# Altium PCB PCB_3U_Tester.PCBDOC (part 2 of 2)
Units mm, origin at the board's own origin, x right, y up, seen from the top; angles counter-clockwise.
Board outline 63.4 x 100 mm, 4 copper layers (Top, MP(GND), L3, Bot), stack 0.905 mm thick; 74 components, 58 nets, 355 pads, 142 vias.
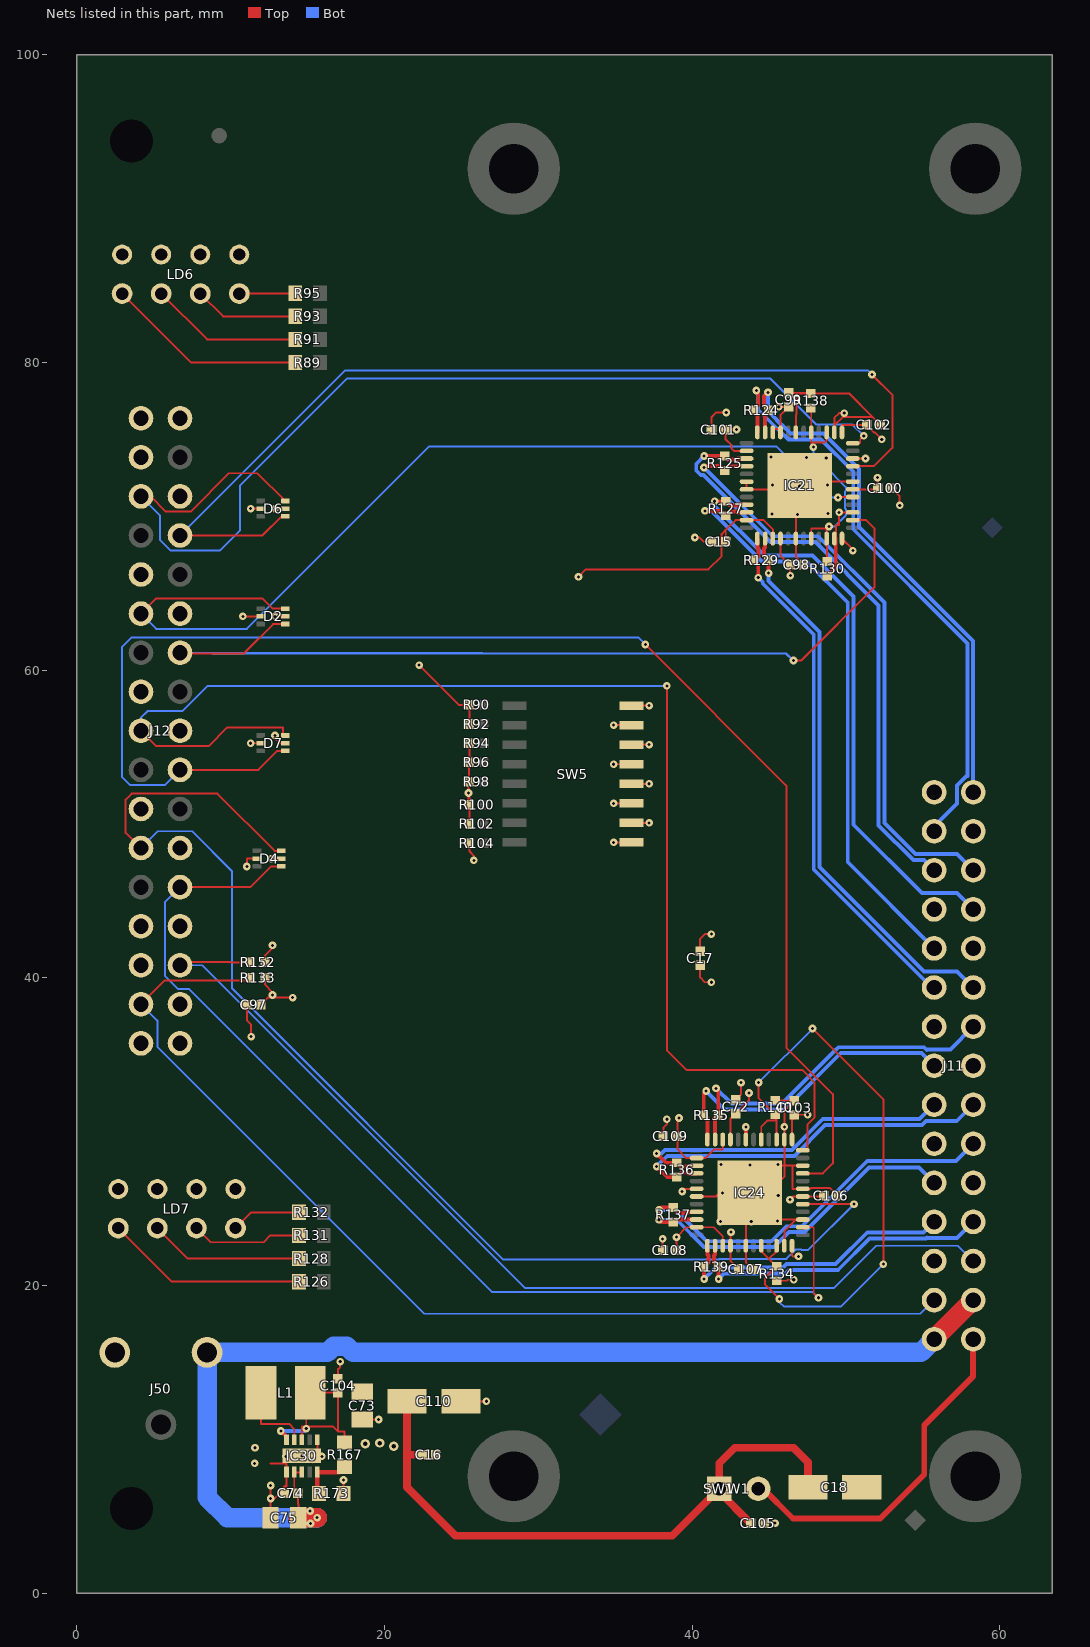
[diagram p4: the nets of this part, all layers, seen from the top]

## Via types
v1: diameter 0.5, hole 0.2, Top to Bot, tented both sides, 139 vias
v2: diameter 0.6, hole 0.3, Top to Bot, tented both sides, 3 vias

## Nets (pads, with @x,y where several pads share a name; then routed paths per layer and width w, separated by ;. In a path a pad name is that pad's centre, name@x,y a point inside that pad or via, vN(x,y) a via of type N, cw(c..) or ccw(c..) an arc to the next point about the centre after c; other vN are vias at no path point) (continued)
GND: C15.1 C16.1 C17.1 C18.2 C72.1 C73.1 C74.1 C75.1 C97.1 C98.1 C99.1 C100.1 C101.1 C102.1 C103.1 C104.1 C105.1 C106.1 C107.1 C108.1 C109.1 C110.2 D2.2 D4.2 D6.2 D7.2 IC21.6 IC21.7 IC21.18 IC21.23 IC21.27 IC21.31 IC21.34 IC21.38 IC21.43 IC21.49 IC24.6 IC24.7 IC24.18 IC24.23 IC24.27 IC24.31 IC24.34 IC24.38 IC24.43 IC24.49 IC30.1 IC30.6 IC30.11 J11.1 J11.4 J11.7 J11.10 J11.13 J11.16 J11.19 J11.22 J11.25 J12.1 J12.2 J12.3 J12.8 J12.11 J12.14 J12.17 J12.20 J12.23 J12.26 J12.29 J12.32 J12.33 J12.34 J50.2 R130.2 R134.2 R138.2 R140.2 R173.1 SW5.9 SW5.10 SW5.11 SW5.12 SW5.13 SW5.14 SW5.15 SW5.16 | length 112.3
  Top w0.127: v1(10.79,63.5) D2.2@11.96,63.5 ; v1(11.048,47.242) 11.048,47.75 D4.2@11.71,47.75 ; C97.1@11.05,38.25 11.05,37.231 11.328,36.952 v1(11.328,36.172) ; v1(11.298,55.25) D7.2@11.96,55.25 ; v1(11.298,70.5) D6.2@11.96,70.5 ; C75.1@12.593,4.902 v1(12.593,6.995) ; v1(12.598,6.147) 12.843,6.147 C74.1@13.469,6.773 ; 12.598,8.433 13.564,8.433 13.63,8.366 IC30.1@13.63,7.865 13.63,7.087 ; C74.1@13.469,6.502 C74.1@13.469,6.773 ; v1(14.63,8.915) IC30.11@15.63,8.915 ; IC30.11@15.316,8.484 15.63,8.798 IC30.11@15.63,8.915 ; IC30.6@15.63,9.965 IC30.11@15.63,8.915 ; C104.1@16.967,13.937 16.967,14.537 17.12,14.69 v1(17.12,15.05) ; R173.1@17.335,6.477 v1(17.335,7.354) ; C73.1@18.542,11.292 v1(19.619,11.292) ; C110.2@24.966,12.471 v1(26.618,12.471) ; v1(34.898,48.805) SW5.9@36.05,48.805 ; v1(34.898,51.345) SW5.11@36.05,51.345 ; v1(34.898,53.885) SW5.13@36.05,53.885 ; v1(34.898,56.425) SW5.15@36.05,56.425 ; SW5.10@36.05,50.075 v1(37.202,50.075) ; SW5.12@36.05,52.615 v1(37.202,52.615) ; SW5.14@36.05,55.155 v1(37.202,55.155) ; SW5.16@36.05,57.695 v1(37.202,57.695) ; C108.1@38.082,22.301 v1(38.082,23.031) ; C109.1@38.133,29.693 38.133,30.258 38.354,30.479 v1(38.354,30.805) ; v1(39.345,26.111) 39.518,26.285 IC24.6@40.289,26.285 IC24.6@40.31,26.285 ; v1(40.17,68.631) 40.466,68.631 40.746,68.351 C15.1@41.282,68.351 ; IC24.7@40.289,25.785 41.536,25.785 ; C17.1@40.513,41.725 40.513,42.526 40.824,42.838 v1(41.25,42.838) ; C101.1@41.257,75.641 41.257,76.442 41.568,76.754 v1(42.215,76.754) ; C72.1@42.824,32.073 43.18,32.429 v1(43.18,33.186) ; IC21.6@43.54,72.259 43.536,72.259 43.536,71.759 IC21.7@43.54,71.759 45.415,71.759 45.415,72.009 IC21.49@46.99,72.009 ; IC24.49@43.739,26.035 IC24.49@43.739,27.785 ; C107.1@43.935,21.057 43.489,21.503 IC24.18@43.489,22.585 43.489,24.236 43.538,24.285 46.736,24.285 ; C105.1@44.697,4.547 v1(45.39,4.547) ; R140.2@45.415,32.042 46.012,32.042 46.057,31.997 C103.1@46.634,31.997 45.989,31.351 v1(45.989,30.312) IC24.38@45.989,29.485 45.989,27.785 ; R134.2@45.491,20.307 46.136,20.307 46.199,20.371 v1(46.604,20.371) ; IC24.23@45.989,22.585 45.989,23.538 46.736,24.285 ; C99.1@46.279,78.022 47.447,78.022 R138.2@47.447,77.991 ; IC21.43@46.74,75.459 46.74,76.585 46.787,76.632 46.787,77.724 47.054,77.991 R138.2@47.447,77.991 ; IC24.27@47.189,24.285 46.736,24.285 ; IC24.34@47.189,27.785 46.533,27.785 ; C98.1@47.262,66.853 46.74,67.375 IC21.18@46.74,68.559 46.74,70.434 46.99,70.434 v1(46.99,71.958) IC21.49@46.99,72.009 ; IC21.23@49.24,68.559 IC21.23@49.335,68.655 ; IC21.38@49.24,75.459 49.24,75.91 ; C106.1@49.447,25.832 48.939,26.34 47.731,26.34 47.676,26.285 IC24.31@47.189,26.285 46.533,26.285 46.533,27.785 ; v1@49.555,70.282 v1(49.555,70.259) ; v1(49.886,76.712) 49.551,76.712 49.24,76.4 49.24,75.91 ; IC21.27@50.44,70.259 v1(49.555,70.259) ; IC21.31@50.44,72.259 47.24,72.259 IC21.49@46.99,72.009 ; IC21.34@50.44,73.759 v1(51.267,73.759) ; C102.1@52.241,75.946 51.733,76.454 ; C100.1@52.977,71.831 53.492,71.316 v1(53.492,70.719) ; C74.1@13.469,6.773 13.63,6.934 13.63,7.01 ; C74.1@13.469,6.773 13.469,6.849 ; 13.469,6.849 13.63,7.01 ; 13.469,6.849 13.469,6.925 13.63,7.087 ; 13.63,7.01 13.63,7.087 ; 41.536,25.785 43.536,27.785 IC24.49@43.739,27.785 ; 41.536,25.785 41.736,25.785 v1(41.961,26.01) 44.479,26.01 44.704,25.785 45.989,27.07 45.989,27.785 ; IC24.49@43.739,27.785 45.568,27.785 45.989,27.785 ; 45.989,27.785 46.533,27.785 ; R138.2@47.447,77.991 R138.2@47.701,77.991 50.196,77.991 51.733,76.454 ; 49.24,75.91 49.784,76.454 51.733,76.454 ; IC21.23@49.335,68.655 49.335,69.342 49.352,69.359 ; IC21.23@49.335,68.655 49.352,68.671 49.352,69.359 ; 49.352,69.359 49.352,69.444 49.437,69.444 ; 49.352,69.359 49.437,69.444 ; 49.437,69.444 49.555,69.444 49.555,69.562 ; 49.437,69.444 49.555,69.562 ; 49.555,69.562 v1(49.555,70.259)
  Top w0.254: IC24.43@43.489,29.485 v1(43.489,30.306) ; R130.2@48.768,66.129 48.787,66.129 49.332,66.674 49.332,68.559 IC21.23@49.24,68.559
  other v1: 11.557,8.433 13.589,8.89 15.926,8.89 11.582,9.449 41.834,24.155 43.84,24.155 45.542,24.181 45.593,25.857 43.79,25.908 43.764,27.838 41.885,27.864 45.568,27.864 46.838,70.129 45.187,70.155 48.819,70.18 45.212,72.034 48.793,72.034 48.717,73.787 47.422,73.838 45.136,73.863
I2C_SCL: J11.27 J12.4 R133.2 | length 69.2
  Top w0.127: J12.4@4.165,38.278 5.715,39.827 11.28,39.827 R133.2@11.28,40
  Bot w0.127: J12.4@4.165,38.278 5.232,37.211 5.232,35.509 22.581,18.161 54.839,18.161 J11.27@55.728,19.05
I2C_SDA: J11.26 J12.5 R152.2 | length 66.6
  Top w0.127: J12.5@6.705,40.818 6.705,41.021 9.987,41.021 10.008,41 R152.2@11.28,41
  Bot w0.127: J12.5@6.705,40.818 8.153,40.818 29.15,19.821 49.209,19.821 51.968,22.581 57.277,22.581 J11.26@58.268,21.59
LVDS1_N: IC21.48 J11.3 R124.2 | length 39.6
  Top w0.254: v1(44.175,78.181) 44.298,78.058 44.298,77.203 R124.2@44.005,76.911 44.299,76.617 44.24,76.558 IC21.48@44.24,75.459
  Bot w0.254: v1(44.175,78.181) 44.298,78.058 44.298,76.931 45.661,75.568 46.252,75.002 48.386,75.002 50.474,72.914 50.474,69.16 57.887,61.747 57.887,53.124 57.831,53.124 57.214,52.507 57.214,51.325 55.728,49.839 J11.3@55.728,49.53
LVDS1_P: IC21.47 J11.2 R124.1 | length 35.7
  Top w0.254: IC21.47@44.74,75.459 44.74,76.587 44.68,76.646 R124.1@44.945,76.911 44.679,77.178 44.679,77.812 v1(44.925,78.058)
  Bot w0.254: v1(44.925,78.058) 44.925,76.868 45.524,76.269 45.524,76.244 45.819,75.949 45.844,75.949 46.41,75.383 48.544,75.383 50.855,73.073 50.855,69.318 58.268,61.905 J11.2@58.268,52.07
LVDS2_N: IC21.4 J11.6 R125.2 | length 39.8
  Top w0.254: v1(40.767,73.179) 40.867,73.279 41.821,73.279 R125.2@42.113,72.987 42.385,73.259 IC21.4@43.54,73.259
  Bot w0.254: v1(40.767,73.179) 45.239,68.707 48.184,68.707 52.502,64.389 52.502,50.063 54.521,48.044 57.214,48.044 J11.6@58.268,46.99
LVDS2_P: IC21.3 J11.5 R125.1 | length 38.7
  Top w0.254: v1(40.78,73.927) R125.1@42.113,73.927 42.34,73.7 42.903,73.7 42.963,73.759 IC21.3@43.54,73.759
  Bot w0.254: v1(40.78,73.927) 40.263,73.41 40.274,73.399 40.263,73.388 40.263,72.971 40.558,72.675 40.732,72.675 45.082,68.326 48.006,68.326 52.121,64.211 52.121,49.906 54.376,47.65 55.067,47.65 J11.5@55.728,46.99
LVDS3_N: IC21.10 J11.9 R127.2 | length 39.5
  Top w0.254: v1(40.839,70.358) 41.872,70.358 R127.2@42.189,70.04 42.467,70.318 42.903,70.318 42.963,70.259 IC21.10@43.54,70.259
  Bot w0.254: v1(40.839,70.358) 41.244,70.358 44.533,67.069 47.434,67.069 50.114,64.389 50.114,47.524 J11.9@55.728,41.91
LVDS3_P: IC21.9 J11.8 R127.1 | length 38.9
  Top w0.254: v1(41.458,70.98) R127.1@42.189,70.98 42.47,70.699 42.903,70.699 42.963,70.759 IC21.9@43.54,70.759
  Bot w0.254: v1(41.458,70.98) 41.458,70.683 44.691,67.45 47.822,67.45 50.495,64.777 50.495,49.952 54.943,45.504 57.214,45.504 J11.8@58.268,44.45
LVDS4_N: IC21.14 J11.12 R129.2 | length 36.1
  Top w0.254: IC21.14@44.74,68.559 44.74,67.982 44.68,67.922 44.68,67.423 R129.2@44.971,67.132 v1(44.971,66.311)
  Bot w0.254: v1(44.971,66.311) 44.971,65.799 48.285,62.484 48.285,47.199 55.06,40.424 57.214,40.424 J11.12@58.268,39.37
LVDS4_P: IC21.13 J11.11 R129.1 | length 34.3
  Top w0.254: IC21.13@44.24,68.559 44.24,67.982 44.299,67.922 44.299,67.401 R129.1@44.031,67.132 44.298,66.865 v1(44.298,66.019)
  Bot w0.254: v1(44.298,66.019) 44.59,65.726 44.59,65.641 47.904,62.326 47.904,47.041 55.575,39.37 J11.11@55.728,39.37
LVDS5_N: IC24.48 J11.15 R135.2 | length 20.5
  Top w0.254: v1(40.907,32.639) 40.754,32.486 R135.2@40.754,31.064 40.78,31.064 41.048,30.796 40.989,30.736 IC24.48@40.989,29.485
  Bot w0.254: v1(40.907,32.639) 42.1,31.445 45.999,31.445 49.657,35.103 54.915,35.103 J11.15@55.728,34.29
LVDS5_P: IC24.47 J11.14 R135.1 | length 22.9
  Top w0.254: IC24.47@41.489,29.485 41.489,30.765 41.429,30.825 41.669,31.064 R135.1@41.694,31.064 41.694,32.677 v1(41.554,32.817)
  Bot w0.254: v1(41.554,32.817) 42.545,31.826 45.842,31.826 49.359,35.344 49.499,35.484 55.073,35.484 55.252,35.305 55.291,35.344 56.164,35.344 56.782,35.344 J11.14@58.268,36.83
LVDS6_N: IC24.4 J11.18 R136.2 | length 25.3
  Top w0.254: v1(37.694,27.737) 38.392,27.038 R136.2@38.989,27.038 39.295,27.345 39.652,27.345 39.712,27.285 IC24.4@40.289,27.285
  Bot w0.254: v1(37.694,27.737) 38.379,28.423 46.64,28.423 48.646,30.429 54.946,30.429 55.2,30.683 57.201,30.683 J11.18@58.268,31.75
LVDS6_P: IC24.3 J11.17 R136.1 | length 22.3
  Top w0.254: v1(37.694,28.575) 38.29,27.978 R136.1@38.989,27.978 39.242,27.726 39.652,27.726 39.712,27.785 IC24.3@40.289,27.785
  Bot w0.254: v1(37.694,28.575) 37.993,28.575 38.222,28.804 46.482,28.804 48.489,30.81 54.788,30.81 J11.17@55.728,31.75
LVDS7_N: IC24.10 J11.21 R137.2 | length 23.7
  Top w0.254: v1(37.846,24.274) 38.003,24.117 R137.2@38.76,24.117 38.928,24.285 IC24.10@40.289,24.285
  Bot w0.254: v1(37.846,24.274) 38.998,24.274 40.78,22.492 45.326,22.492 46.301,23.467 47.298,23.467 51.491,27.661 54.737,27.661 J11.21@55.728,26.67
LVDS7_P: IC24.9 J11.20 R137.1 | length 26.6
  Top w0.254: v1(37.846,24.901) 38.003,25.057 R137.1@38.76,25.057 39.033,24.785 39.221,24.785 39.288,24.718 39.706,24.718 39.773,24.785 IC24.9@40.289,24.785
  Bot w0.254: v1(37.846,24.901) 38.909,24.901 40.665,23.145 40.938,22.873 45.168,22.873 46.144,23.848 47.14,23.848 51.384,28.092 57.15,28.092 J11.20@58.268,29.21
LVDS8_N: IC24.14 J11.24 R139.2 | length 20.4
  Top w0.254: IC24.14@41.489,22.585 41.489,22.008 41.429,21.948 41.429,21.499 R139.2@41.72,21.209 v1(41.72,20.422)
  Bot w0.254: v1(41.72,20.422) 42.075,20.777 46.056,20.777 46.288,21.01 49.483,21.01 49.53,21.057 51.537,23.063 55.2,23.063 55.252,23.115 55.291,23.076 56.164,23.076 57.214,23.076 J11.24@58.268,24.13
LVDS8_P: IC24.13 J11.23 R139.1 | length 18.8
  Top w0.254: v1(40.78,20.422) R139.1@40.78,21.209 41.048,21.478 41.048,21.948 40.989,22.008 IC24.13@40.989,22.585
  Bot w0.254: v1(40.78,20.422) 41.465,21.107 41.867,21.107 41.917,21.158 45.898,21.158 46.13,21.391 49.325,21.391 51.379,23.444 55.042,23.444 J11.23@55.728,24.13
NetIC21_20: IC21.20 IC21.22 IC21.39 IC21.41 R130.1 R138.1 | length 15
  Top w0.127: R138.1@47.701,77.051 47.74,77.012 IC21.41@47.74,75.459 47.74,74.79 ; IC21.20@47.74,68.559 47.74,69.215 v1@48.768,69.215 ; v1(47.879,74.498) 47.74,74.637 47.74,74.79 ; IC21.39@48.74,75.459 48.74,74.93 48.6,74.79 47.74,74.79 ; R130.1@48.768,67.069 48.768,68.047 48.74,68.075 IC21.22@48.74,68.559 48.74,69.187 v1@48.768,69.215 ; v1(48.895,69.342) v1@48.768,69.215
  Bot w0.127: v1(47.879,74.498) 47.879,74.002 48.535,73.347 48.548,73.347 49.996,71.899 49.996,71.679 49.922,71.605 49.922,70.538 49.996,70.464 49.996,70.077 49.974,70.055 ; v1(48.895,69.342) 49.261,69.342 49.974,70.055
NetIC24_20: IC24.20 IC24.22 IC24.39 IC24.41 R134.1 R140.1 | length 42.5
  Top w0.127: v1(44.323,33.198) 44.323,32.182 45.403,31.102 R140.1@45.415,31.102 ; IC24.20@44.489,22.585 44.489,22.237 44.989,21.737 ; IC24.41@44.489,29.485 44.489,30.304 44.919,30.734 45.415,30.734 R140.1@45.415,31.102 ; IC24.22@45.489,22.585 45.489,22.237 44.989,21.737 ; IC24.39@45.489,29.485 45.489,30.734 R140.1@45.415,31.102 ; R134.1@45.491,21.247 R134.1@45.485,21.241 ; v1(45.669,19.126) 44.729,20.066 44.729,20.485 R134.1@45.485,21.241 ; v1(47.828,36.703) 52.426,32.106 v1(52.426,21.387) ; 44.989,21.737 R134.1@45.485,21.241
  Bot w0.127: v1(44.323,33.198) v1(47.828,36.703) ; v1(45.669,19.126) 45.669,18.923 45.974,18.618 49.657,18.618 v1(52.426,21.387)
NetIC30_5: IC30.5 R167.1 R173.2 | length 3.3
  Top w0.305: R173.2@15.735,6.477 15.63,6.582 IC30.5@15.63,7.865 17.073,7.865 R167.1@17.399,8.192
NetIC30_9: IC30.9 L1.1 | length 5
  Top w0.127: L1.1@11.964,13.03 11.964,10.998 13.8,10.998 14.13,10.668 IC30.9@14.13,9.965
NetLD6_1: LD6.1 R89.1 | length 13.1
  Top w0.127: LD6.1@2.94,84.48 7.42,80 R89.1@14.2,80
NetLD6_3: LD6.3 R91.1 | length 10
  Top w0.127: LD6.3@5.48,84.48 8.46,81.5 R91.1@14.2,81.5
NetLD6_5: LD6.5 R93.1 | length 6.8
  Top w0.127: LD6.5@8.02,84.48 9.5,83 R93.1@14.2,83
NetLD6_7: LD6.7 R95.1 | length 3.6
  Top w0.127: LD6.7@10.56,84.48 12.37,84.48 12.39,84.5 R95.1@14.2,84.5
NetLD7_1: LD7.1 R126.1 | length 13.2
  Top w0.127: LD7.1@2.69,23.73 6.17,20.25 R126.1@14.45,20.25
NetLD7_3: LD7.3 R128.1 | length 10
  Top w0.127: LD7.3@5.23,23.73 7.21,21.75 R128.1@14.45,21.75
NetLD7_5: LD7.5 R131.1 | length 7.2
  Top w0.127: LD7.5@7.77,23.73 8.691,22.809 12.141,22.809 12.582,23.25 R131.1@14.45,23.25
NetLD7_7: LD7.7 R132.1 | length 4.6
  Top w0.127: LD7.7@10.31,23.73 11.33,24.75 R132.1@14.45,24.75
P3V3: C15.2 C16.2 C17.2 C18.1 C72.2 C73.2 C97.2 C98.2 C99.2 C100.2 C101.2 C102.2 C103.2 C104.2 C105.2 C106.2 C107.2 C108.2 C109.2 C110.1 D2.5 D4.5 D6.5 D7.5 IC21.2 IC21.11 IC21.15 IC21.16 IC21.24 IC21.30 IC21.37 IC21.45 IC21.46 IC24.2 IC24.11 IC24.15 IC24.16 IC24.24 IC24.30 IC24.37 IC24.45 IC24.46 IC30.8 IC30.10 J12.6 J12.7 L1.2 LD6.2 LD6.4 LD6.6 LD6.8 LD7.2 LD7.4 LD7.6 LD7.8 R90.2 R92.2 R94.2 R96.2 R98.2 R100.2 R102.2 R104.2 R133.1 R152.1 R167.2 SW1.1 W1.1 | length 134.6
  Top w0.127: C97.2@11.95,38.25 12.41,38.71 v1(14.028,38.71) ; R133.1@12.22,40 12.22,39.572 12.715,39.076 v1(12.715,38.887) ; R152.1@12.22,41 12.22,41.429 12.715,41.924 v1(12.715,42.113) ; v1(12.628,47.75) D4.5@13.29,47.75 ; v1(12.878,55.758) 12.878,55.58 13.208,55.25 D7.5@13.54,55.25 ; v1(12.878,63.5) D2.5@13.54,63.5 ; v1(12.878,70.5) D6.5@13.54,70.5 ; IC30.8@14.63,9.965 14.63,10.846 v1@14.91,10.846 ; v1(14.91,10.693) v1@14.91,10.846 ; R167.2@17.399,9.792 17.399,10.516 16.967,10.516 ; v1(22.25,60.325) 24.825,57.75 R90.2@25.527,57.75 ; 25.454,51.567 25.454,51.761 ; R104.2@25.53,48.75 25.53,48.212 25.806,47.936 v1(25.806,47.637) ; R94.2@25.53,55.25 25.53,54.407 ; R92.2@25.53,56.5 25.527,56.5 R90.2@25.527,57.75 ; R90.2@25.53,57.75 R90.2@25.527,57.75 ; v1(32.614,66.065) 33.096,66.548 41.046,66.548 41.91,67.412 41.91,68.845 42.182,69.117 ; C108.2@38.982,22.301 v1(38.982,23.143) 39.624,23.785 IC24.11@40.289,23.785 41.391,23.785 41.989,23.188 IC24.15@41.989,22.585 ; v1(39.141,30.886) 39.033,30.778 C109.2@39.033,29.693 39.033,28.876 39.624,28.285 IC24.2@40.289,28.285 40.858,28.285 41.402,28.829 41.989,28.829 IC24.46@41.989,29.485 ; C17.2@40.513,40.825 40.513,40.024 40.824,39.712 v1(41.25,39.712) ; C15.2@42.182,68.351 42.182,69.117 ; IC24.45@42.489,29.485 42.489,30.837 C72.2@42.824,31.173 43.688,32.037 v1(43.688,32.512) ; v1(42.52,23.47) 42.489,23.439 IC24.16@42.489,22.585 42.489,21.603 C107.2@43.035,21.057 ; v1(42.875,75.641) C101.2@42.157,75.641 42.157,75.028 42.545,74.64 42.545,74.422 42.708,74.259 IC21.2@43.54,74.259 ; IC21.15@45.24,68.555 IC21.15@45.24,68.559 45.24,69.162 44.643,69.759 IC21.11@43.54,69.759 42.824,69.759 42.182,69.117 ; IC21.46@45.24,75.459 45.24,75.692 IC21.45@45.74,75.692 ; v1(45.626,77.122) C99.2@46.279,77.122 45.74,76.583 IC21.45@45.74,75.692 ; IC21.16@45.74,68.559 45.74,67.475 C98.2@46.362,66.853 46.362,66.16 v1(46.38,66.142) ; IC21.45@45.74,75.459 IC21.45@45.74,75.692 ; v1(46.355,25.578) 46.562,25.785 IC24.30@47.189,25.785 48.5,25.785 C106.2@48.547,25.832 ; IC24.24@46.489,22.585 46.489,21.952 46.546,21.895 v1(46.914,21.895) ; IC24.37@46.489,29.485 46.489,30.836 46.634,30.836 C103.2@46.634,31.097 v1(47.505,31.097) ; IC21.24@49.74,68.559 50.444,67.855 v1(50.444,67.767) ; IC21.37@49.74,75.459 49.74,75.946 C102.2@51.341,75.946 51.849,75.438 51.892,75.438 v1(52.324,75.006) ; IC21.30@50.44,71.759 52.005,71.759 C100.2@52.077,71.831 52.077,72.484 v1(52.045,72.517) ; v1@14.91,10.846 16.637,10.846 16.967,10.516 ; v1@14.91,10.846 14.91,12.548 15.4,13.037 C104.2@16.967,13.037 16.967,10.516 ; 25.454,51.761 v1(25.454,52.019) 25.454,52.368 25.472,52.753 R96.2@25.53,54 ; 25.454,51.761 25.577,51.637 25.53,51.59 R100.2@25.53,51.25 25.53,50.394 ; 25.53,50.394 25.552,50.371 25.552,50 R102.2@25.53,50 25.53,50.394 ; R96.2@25.53,54 25.552,54 25.552,54.384 25.53,54.407 ; R96.2@25.53,54 25.53,54.407
  Top w0.254: v1(13.259,10.541) 13.63,10.169 IC30.10@13.63,9.965
  Top w0.508: C110.1@21.466,12.471 21.466,8.89 ; C16.2@22.435,8.992 21.567,8.992 21.466,8.89 ; C105.2@43.797,4.547 41.758,6.586 W1.1@41.758,6.782 ; C18.1@47.526,6.883 47.526,8.506 46.584,9.449 42.774,9.449 41.758,8.433 W1.1@41.758,6.782 ; 21.466,8.89 21.466,6.881 24.613,3.734 38.71,3.734 W1.1@41.758,6.782
  Bot w0.254: v1(13.259,10.541) 14.757,10.541 v1(14.91,10.693)
  other v2: 20.599,9.55 18.745,9.703 19.685,9.754
P3V3_MP: J11.30 W1.2 | length 22.9
  Top w0.381: W1.2@44.298,6.782 44.628,6.782 46.558,4.851 52.222,4.851 55.082,7.711 55.082,10.917 58.268,14.103 J11.30@58.268,16.51
P12V0: C74.2 C75.2 IC30.2 IC30.3 J11.28 J11.29 J50.1 | length 73.6
  Top w0.127: IC30.2@14.13,7.865 IC30.2@14.13,7.849 ; C75.2@14.393,4.902 14.393,5.791 14.369,5.815 C74.2@14.369,6.502 14.13,6.502 IC30.2@14.13,7.849 ; IC30.3@14.63,7.865 14.63,7.849 IC30.2@14.13,7.849
  Top w1.27: C75.2@14.393,4.902 v1(15.621,4.902) ; J11.29@55.728,16.51 J11.28@58.268,19.05
  Bot w1.27: v1(15.621,4.902) 9.779,4.902 8.464,6.217 J50.1@8.464,15.646 16.285,15.646 16.7,16.062 17.539,16.062 17.954,15.646 54.864,15.646 J11.29@55.728,16.51
  other v1: 15.189,4.521 15.164,5.334
R1: D6.6 IC21.36 J12.30 | length 69.9
  Top w0.127: J12.30@4.165,71.298 4.788,71.298 5.778,70.307 7.391,70.307 9.888,72.803 11.735,72.803 13.538,71 D6.6@13.54,71 ; IC21.36@50.44,74.759 50.927,74.759 50.927,75.006 v1(51.156,75.235)
  Bot w0.127: J12.30@4.165,71.298 5.41,70.053 5.41,68.453 6.096,67.767 9.296,67.767 10.617,69.088 10.617,72.009 17.577,78.969 45.06,78.969 48.057,75.971 50.419,75.971 v1(51.156,75.235)
R2: D6.4 IC21.33 J12.27 | length 65.3
  Top w0.127: J12.27@6.705,68.758 12.067,68.758 13.31,70 D6.4@13.54,70 ; IC21.33@50.44,73.259 51.816,73.259 53.01,74.453 53.01,77.902 v1(51.689,79.223)
  Bot w0.127: J12.27@6.705,68.758 17.424,79.477 51.435,79.477 v1(51.689,79.223)
R3: D2.6 IC21.29 J12.24 | length 63.1
  Top w0.127: J12.24@4.165,63.678 5.156,64.668 12.057,64.668 12.725,64 D2.6@13.54,64 ; v1(49.479,71.222) 49.517,71.259 IC21.29@50.44,71.259
  Bot w0.127: J12.24@4.165,63.678 5.156,62.687 11.049,62.687 22.911,74.549 45.466,74.549 48.793,71.222 v1(49.479,71.222)
R4: D2.4 IC21.26 J12.21 | length 98.4
  Top w0.127: J12.21@6.705,61.138 6.763,61.08 10.831,61.08 12.751,63 D2.4@13.54,63 ; v1(46.584,60.63) 47.087,60.63 51.841,65.384 51.841,69.226 51.308,69.759 IC21.26@50.44,69.759
  Bot w0.127: J12.21@6.705,61.138 46.076,61.08 ; 8.77,61.08 46.076,61.08 ; 46.076,61.08 v1(46.584,60.63) 46.133,61.08 46.076,61.08
R5: D7.6 IC24.36 J12.18 | length 85.7
  Top w0.127: J12.18@4.165,56.058 5.156,55.067 8.56,55.067 9.754,56.261 13.411,56.261 13.411,55.75 D7.6@13.54,55.75 ; v1(38.354,58.979) 38.354,35.281 39.624,34.011 47.142,34.011 47.946,33.207 47.946,30.914 47.498,30.467 47.498,28.785 IC24.36@47.189,28.785
  Bot w0.127: J12.18@4.165,56.058 4.165,56.896 4.623,57.353 6.884,57.353 8.509,58.979 v1(38.354,58.979)
R6: D7.4 IC24.33 J12.15 | length 95.7
  Top w0.127: J12.15@6.705,53.518 11.798,53.518 13.03,54.75 D7.4@13.54,54.75 ; v1(36.957,61.671) 46.126,52.502 46.126,35.458 49.149,32.436 49.149,27.94 48.494,27.285 IC24.33@47.189,27.285
  Bot w0.127: J12.15@6.705,53.518 5.715,52.527 3.48,52.527 2.921,53.086 2.921,61.493 3.556,62.128 36.5,62.128 v1(36.957,61.671)
R7: D4.6 IC24.29 J12.12 | length 83
  Top w0.127: J12.12@4.165,48.438 3.175,49.428 3.175,51.587 3.556,51.968 9.134,51.968 12.852,48.25 D4.6@13.29,48.25 ; IC24.29@47.189,25.285 v1(50.521,25.285)
  Bot w0.127: J12.12@4.165,48.438 5.258,49.53 7.493,49.53 10.084,46.939 10.084,39.319 27.726,21.677 41.713,21.677 41.766,21.73 46.126,21.73 46.731,22.335 47.096,22.335 47.122,22.31 47.546,22.31 v1(50.521,25.285)
R8: D4.4 IC24.26 J12.9 | length 69.9
  Top w0.127: J12.9@6.705,45.898 11.272,45.898 12.624,47.25 D4.4@13.29,47.25 ; IC24.26@47.189,23.785 47.904,23.785 47.904,19.507 v1(48.209,19.202)
  Bot w0.127: J12.9@6.705,45.898 5.715,44.907 5.715,40.132 6.579,39.268 7.29,39.268 26.991,19.567 47.845,19.567 v1(48.209,19.202)
pads on no net: FTG5.FTG2 FTG6.1 FTG7.1 FTG8.1 IC21.17 IC21.44 IC24.17 IC24.44 IC30.4 IC30.7 J50.3
copper on no net: | length 2619.8
  Top w0.025: 165.37,39.315 167.902,41.846 170.95,44.895 173.998,47.942 177.046,50.99 180.094,54.038 183.142,57.087 186.19,60.134 189.238,63.182 192.286,66.23 193.81,67.754 ; 165.37,40.839 166.378,41.846 169.426,44.895 172.474,47.942 175.522,50.99 178.57,54.038 181.618,57.087 184.666,60.134 187.714,63.182 190.762,66.23 193.81,69.278 ; 165.37,42.363 167.902,44.895 170.95,47.942 173.998,50.99 177.046,54.038 180.094,57.087 183.142,60.134 186.19,63.182 189.238,66.23 192.286,69.278 193.81,70.802 ; 165.37,43.887 166.378,44.895 169.426,47.942 172.474,50.99 175.522,54.038 178.57,57.087 181.618,60.134 184.666,63.182 187.714,66.23 190.762,69.278 193.81,72.326 ; 165.37,45.411 167.902,47.942 170.95,50.99 173.998,54.038 177.046,57.087 180.094,60.134 183.142,63.182 186.19,66.23 189.238,69.278 192.286,72.326 ; 165.37,46.935 166.378,47.942 169.426,50.99 172.474,54.038 175.522,57.087 178.57,60.134 181.618,63.182 184.666,66.23 187.714,69.278 190.762,72.326 ; 165.37,48.459 167.902,50.99 170.95,54.038 173.998,57.087 177.046,60.134 180.094,63.182 183.142,66.23 186.19,69.278 189.238,72.326 ; 165.37,49.983 166.378,50.99 169.426,54.038 172.474,57.087 175.522,60.134 178.57,63.182 181.618,66.23 184.666,69.278 187.714,72.326 ; 165.37,51.507 167.902,54.038 170.95,57.087 173.998,60.134 177.046,63.182 180.094,66.23 183.142,69.278 186.19,72.326 ; 165.37,53.031 166.378,54.038 169.426,57.087 172.474,60.134 175.522,63.182 178.57,66.23 181.618,69.278 184.666,72.326 ; 165.37,54.555 167.902,57.087 170.95,60.134 173.998,63.182 177.046,66.23 180.094,69.278 183.142,72.326 ; 165.37,56.079 166.378,57.087 169.426,60.134 172.474,63.182 175.522,66.23 178.57,69.278 181.618,72.326 ; 165.37,57.603 167.902,60.134 170.95,63.182 173.998,66.23 177.046,69.278 180.094,72.326 ; 165.37,59.127 166.378,60.134 169.426,63.182 172.474,66.23 175.522,69.278 178.57,72.326 ; 165.37,60.651 167.902,63.182 170.95,66.23 173.998,69.278 177.046,72.326 ; 165.37,62.175 166.378,63.182 169.426,66.23 172.474,69.278 175.522,72.326 ; 165.37,63.699 167.902,66.23 170.95,69.278 173.998,72.326 ; 165.37,65.223 166.378,66.23 169.426,69.278 172.474,72.326 ; 165.37,66.747 167.902,69.278 170.95,72.326 ; 165.37,68.271 166.378,69.278 169.426,72.326 ; 165.37,69.795 167.902,72.326 ; 165.37,71.319 166.378,72.326 ; 166.378,38.798 169.426,41.846 172.474,44.895 175.522,47.942 178.57,50.99 181.618,54.038 184.666,57.087 187.714,60.134 190.762,63.182 193.81,66.23 ; 167.902,38.798 170.95,41.846 173.998,44.895 177.046,47.942 180.094,50.99 183.142,54.038 186.19,57.087 189.238,60.134 192.286,63.182 193.81,64.706 ; 169.426,38.798 172.474,41.846 175.522,44.895 178.57,47.942 181.618,50.99 184.666,54.038 187.714,57.087 190.762,60.134 193.81,63.182 ; 170.95,38.798 173.998,41.846 177.046,44.895 180.094,47.942 183.142,50.99 186.19,54.038 189.238,57.087 192.286,60.134 193.81,61.658 ; 172.474,38.798 175.522,41.846 178.57,44.895 181.618,47.942 184.666,50.99 187.714,54.038 190.762,57.087 193.81,60.134 ; 173.998,38.798 177.046,41.846 180.094,44.895 183.142,47.942 186.19,50.99 189.238,54.038 192.286,57.087 193.81,58.61 ; 175.522,38.798 178.57,41.846 181.618,44.895 184.666,47.942 187.714,50.99 190.762,54.038 193.81,57.087 ; 177.046,38.798 180.094,41.846 183.142,44.895 186.19,47.942 189.238,50.99 192.286,54.038 193.81,55.562 ; 178.57,38.798 181.618,41.846 184.666,44.895 187.714,47.942 190.762,50.99 193.81,54.038 ; 180.094,38.798 183.142,41.846 186.19,44.895 189.238,47.942 192.286,50.99 193.81,52.514 ; 181.618,38.798 184.666,41.846 187.714,44.895 190.762,47.942 193.81,50.99 ; 183.142,38.798 186.19,41.846 189.238,44.895 192.286,47.942 193.81,49.466 ; 184.666,38.798 187.714,41.846 190.762,44.895 193.81,47.942 ; 186.19,38.798 189.238,41.846 192.286,44.895 193.81,46.419 ; 187.714,38.798 190.762,41.846 193.81,44.895 ; 189.238,38.798 192.286,41.846 193.81,43.37 ; 190.762,38.798 193.81,41.846 ; 192.286,38.798 193.81,40.322
  Top w0.381: 80.048,41.846 90.46,41.846 112.552,41.846 134.39,41.846 150.896,41.846 165.37,41.846 193.81,41.846 ; 80.048,44.895 90.46,44.895 112.552,44.895 134.39,44.895 150.896,44.895 165.37,44.895 193.81,44.895 ; 80.048,47.942 90.46,47.942 112.552,47.942 134.39,47.942 150.896,47.942 165.37,47.942 193.81,47.942 ; 80.048,50.99 90.46,50.99 112.552,50.99 134.39,50.99 150.896,50.99 165.37,50.99 193.81,50.99 ; 80.048,54.038 90.46,54.038 112.552,54.038 134.39,54.038 150.896,54.038 165.37,54.038 193.81,54.038 ; 80.048,57.087 90.46,57.087 112.552,57.087 134.39,57.087 150.896,57.087 165.37,57.087 193.81,57.087 ; 80.048,60.134 90.46,60.134 112.552,60.134 134.39,60.134 150.896,60.134 165.37,60.134 193.81,60.134 ; 80.048,63.182 90.46,63.182 112.552,63.182 134.39,63.182 150.896,63.182 165.37,63.182 193.81,63.182 ; 80.048,66.23 90.46,66.23 112.552,66.23 134.39,66.23 150.896,66.23 165.37,66.23 193.81,66.23 ; 80.048,69.278 90.46,69.278 112.552,69.278 134.39,69.278 150.896,69.278 165.37,69.278 193.81,69.278 ; 80.048,72.326 193.81,72.326 ; 90.46,75.374 90.46,38.798 ; 112.552,75.374 112.552,38.798 ; 134.39,75.374 134.39,38.798 ; 150.896,75.374 150.896,38.798 ; 165.37,75.374 165.37,38.798 ; 90.46,38.798 112.552,38.798 ; 90.46,38.798 80.048,38.798 80.048,75.374 193.81,75.374 193.81,38.798 165.37,38.798 ; 112.552,38.798 134.39,38.798 ; 134.39,38.798 150.896,38.798 ; 150.896,38.798 165.37,38.798

## Polygon pours and split planes (outlines as drawn)
P3V3 on Top "Top Overlay-No Net" (solid, remove dead copper, pour order 30): 12.7,16.51 21.59,16.51 21.59,8.89 19.05,8.89 16.51,10.16 13.97,10.16 12.7,11.43
GND on Top "L3-No Net" (solid, remove dead copper, pour order 36): -0.152,100.254 0.279,99.822 63.525,99.822 63.525,-0.152 63.424,-0.254 -0.025,-0.254
P3V3 on L3 "L3-No Net" (solid, remove dead copper, pour order 32): 0.025,100.051 63.348,100.051 63.398,100 63.348,99.949 63.348,-0.051 0.203,-0.051 0.076,0.076
GND on Bot "L3-No Net" (solid, remove dead copper, pour order 34): 0.102,99.924 63.348,99.924 63.17,99.746 63.17,-0.127 0,-0.127
GND on MP(GND) (split plane): 62.89,0.51 0.51,0.51 0.51,99.489 62.89,99.489

## Keep-outs
KeepOutLayer:
  lines w0.203: 1.651,8.103 6.096,8.103 6.096,3.023 62.4,3.023 62.4,97.003 6.096,97.003 6.096,91.923 1.651,91.923 1.651,8.103

## Other copper
Top:
  rectangle net GND: 15.316,8.484 16.281,9.347
  region net GND: 13.31,9.703 11.201,9.703 11.201,8.103 13.31,8.103
  rectangle net GND: 12.598,8.433 13.614,9.398
  region net P3V3: 20.142,12.141 20.142,10.033 21.742,10.033 21.742,12.141
  region net GND: 23.8,12.167 23.8,10.058 25.4,10.058 25.4,12.167
  text "Layer" at 81.572,73.088 h1.52
  text "Name" at 91.984,73.088 h1.52
  text "Material" at 114.076,73.088 h1.52
  text "Thickness" at 135.914,73.088 h1.52
  text "Constant" at 152.42,73.088 h1.52
  text "Board Layer Stack" at 166.894,73.088 h1.52
  text "1" at 81.572,70.04 h1.52
  text "TopOverlay" at 91.984,70.04 h1.52
  text "2" at 81.572,66.992 h1.52
  text "TopSolder" at 91.984,66.992 h1.52
  text "Solder Resist" at 114.076,66.992 h1.52
  text "0.010mm" at 135.914,66.992 h1.52
  text "3.5" at 152.42,66.992 h1.52
  text "3" at 81.572,63.944 h1.52
  text "Top" at 91.984,63.944 h1.52
  text "Copper" at 114.076,63.944 h1.52
  text "0.036mm" at 135.914,63.944 h1.52
  text "4" at 81.572,60.896 h1.52
  text "Dielectric1" at 91.984,60.896 h1.52
  text "FR-4" at 114.076,60.896 h1.52
  text "0.381mm" at 135.914,60.896 h1.52
  text "4.8" at 152.42,60.896 h1.52
  text "5" at 81.572,57.848 h1.52
  text "MP(GND)" at 91.984,57.848 h1.52
  text "Copper" at 114.076,57.848 h1.52
  text "0.036mm" at 135.914,57.848 h1.52
  text "6" at 81.572,54.8 h1.52
  text "Dielectric 3" at 91.984,54.8 h1.52
  text "0.254mm" at 135.914,54.8 h1.52
  text "4.2" at 152.42,54.8 h1.52
  text "7" at 81.572,51.752 h1.52
  text "L3" at 91.984,51.752 h1.52
  text "Copper" at 114.076,51.752 h1.52
  text "0.036mm" at 135.914,51.752 h1.52
  text "8" at 81.572,48.704 h1.52
  text "Dielectric 4" at 91.984,48.704 h1.52
  text "0.127mm" at 135.914,48.704 h1.52
  text "4.2" at 152.42,48.704 h1.52
  text "9" at 81.572,45.657 h1.52
  text "Bot" at 91.984,45.657 h1.52
  text "Copper" at 114.076,45.657 h1.52
  text "0.036mm" at 135.914,45.657 h1.52
  text "10" at 81.572,42.608 h1.52
  text "BottomSolder" at 91.984,42.608 h1.52
  text "Solder Resist" at 114.076,42.608 h1.52
  text "0.010mm" at 135.914,42.608 h1.52
  text "3.5" at 152.42,42.608 h1.52
  text "11" at 81.572,39.56 h1.52
  text "BottomOverlay" at 91.984,39.56 h1.52

## Silkscreen, mask and mechanical layers (free items; w line width, h text height)
TopOverlay:
  drawing of 1239 lines, arcs and shapes, not listed
  text "DIR 0..3" at 8.611,89.916 h1.52
  text "bot 0" at 13.487,87.579 h1.52
  text "top 3" at 13.386,85.801 h1.52
  text "0" at 39.395,57.15 h1.52 r90
  text "1" at 39.395,55.891 h1.52 r90
  text "2" at 39.395,54.632 h1.52 r90
  text "3" at 39.395,53.373 h1.52 r90
  text "4" at 39.395,52.114 h1.52 r90
  text "5" at 39.395,50.854 h1.52 r90
  text "6" at 39.395,49.595 h1.52 r90
  text "7" at 39.395,48.336 h1.52 r90
  text "SW: ON = OUT" at 41.986,45.796 h1.52 r90
  text "dir 4..7" at 9.474,29.693 h1.52
  text "bot 7" at 13.335,27.737 h1.52
  text "top 0" at 13.259,26.035 h1.52
  text "TO KASLI/METLINO VHDCI" at 52.045,24.333 h1.02 r90
  text "P3V3_MP ON" at 36.068,11.227 h1.52
  text "PCB 3U Tester_TTL rev1.1" at 15.316,0.965 h2.03
BottomOverlay:
  drawing of 1237 lines, arcs and shapes, not listed
  text "PCB 3U Tester TTL rev1.1" at 49.047,0.889 h2.03
Mechanical1:
  the board outline again, w0.508

## Dimensions
3.556,-0.508 to 0,0 on Mechanical4
-0.508,5.512 to 0,0 on Mechanical4

## Text inside footprints (layer, text, board x,y; h text height)
J11: TopOverlay "30" at 59.665,17.145 h1.02 r270; Mechanical14 "30" at 59.665,17.145 h1.02 r270
J12: TopOverlay "34" at 5.229,77.863 h1.02 r90; Mechanical14 "34" at 5.229,77.863 h1.02 r90
LD6: TopOverlay "D" at 9.779,85.419 h1 r90; TopOverlay "C" at 7.239,85.419 h1 r90; TopOverlay "B" at 4.699,85.419 h1 r90; TopOverlay "A" at 2.159,85.419 h1 r90; TopOverlay "A" at 11.83,86.639 h1; TopOverlay "C" at 11.83,84.099 h1; Mechanical14 "D" at 9.779,85.419 h1 r90; Mechanical14 "C" at 7.239,85.419 h1 r90; Mechanical14 "B" at 4.699,85.419 h1 r90; Mechanical14 "A" at 2.159,85.419 h1 r90; Mechanical14 "C" at 11.83,84.099 h1; Mechanical14 "A" at 11.83,86.639 h1
LD7: TopOverlay "D" at 9.529,24.669 h1 r90; TopOverlay "C" at 6.989,24.669 h1 r90; TopOverlay "B" at 4.449,24.669 h1 r90; TopOverlay "A" at 1.909,24.669 h1 r90; TopOverlay "A" at 11.58,25.889 h1; TopOverlay "C" at 11.58,23.349 h1; Mechanical14 "D" at 9.529,24.669 h1 r90; Mechanical14 "C" at 6.989,24.669 h1 r90; Mechanical14 "B" at 4.449,24.669 h1 r90; Mechanical14 "A" at 1.909,24.669 h1 r90; Mechanical14 "C" at 11.58,23.349 h1; Mechanical14 "A" at 11.58,25.889 h1
SW5: TopOverlay "8" at 29.964,49.059 h1 r270; TopOverlay "7" at 29.964,50.329 h1 r270; TopOverlay "6" at 29.964,51.599 h1 r270; TopOverlay "5" at 29.964,52.869 h1 r270; TopOverlay "4" at 29.964,54.139 h1 r270; TopOverlay "3" at 29.964,55.409 h1 r270; TopOverlay "ON" at 33.52,58.33 h1 r270; TopOverlay "2" at 29.964,56.679 h1 r270; TopOverlay "1" at 29.964,57.949 h1 r270; Mechanical14 "8" at 29.974,49.059 h1 r270; Mechanical14 "7" at 29.974,50.329 h1 r270; Mechanical14 "6" at 29.974,51.599 h1 r270; Mechanical14 "5" at 29.974,52.869 h1 r270; Mechanical14 "4" at 29.974,54.139 h1 r270; Mechanical14 "3" at 29.974,55.409 h1 r270; Mechanical14 "ON" at 33.53,58.33 h1 r270; Mechanical14 "2" at 29.974,56.679 h1 r270; Mechanical14 "1" at 29.974,57.949 h1 r270